# Altium PCB exercise3.PcbDoc
Units mil, origin at the board's own origin, x right, y up, seen from the top; angles counter-clockwise.
Board outline 3910 x 2550 mil, 2 copper layers (Top Layer, Bottom Layer); 24 components, 20 nets, 74 pads, 3 vias.
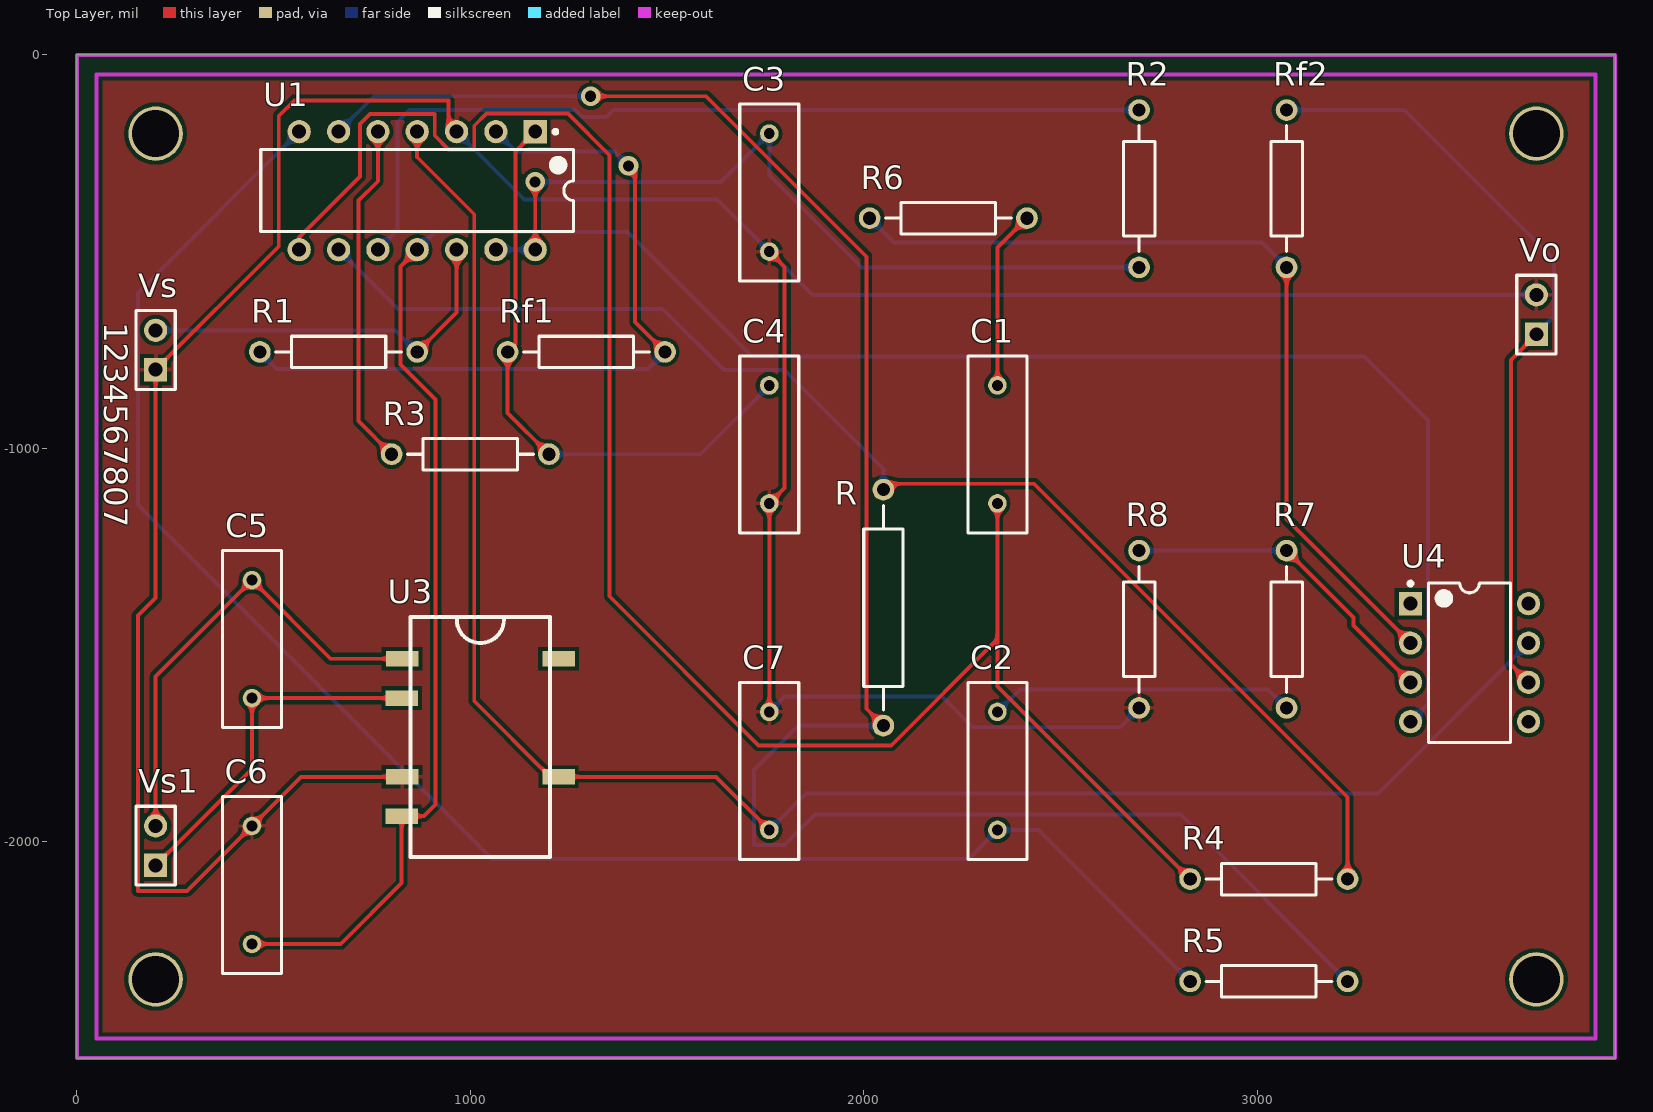
[diagram p0: Top Layer view]
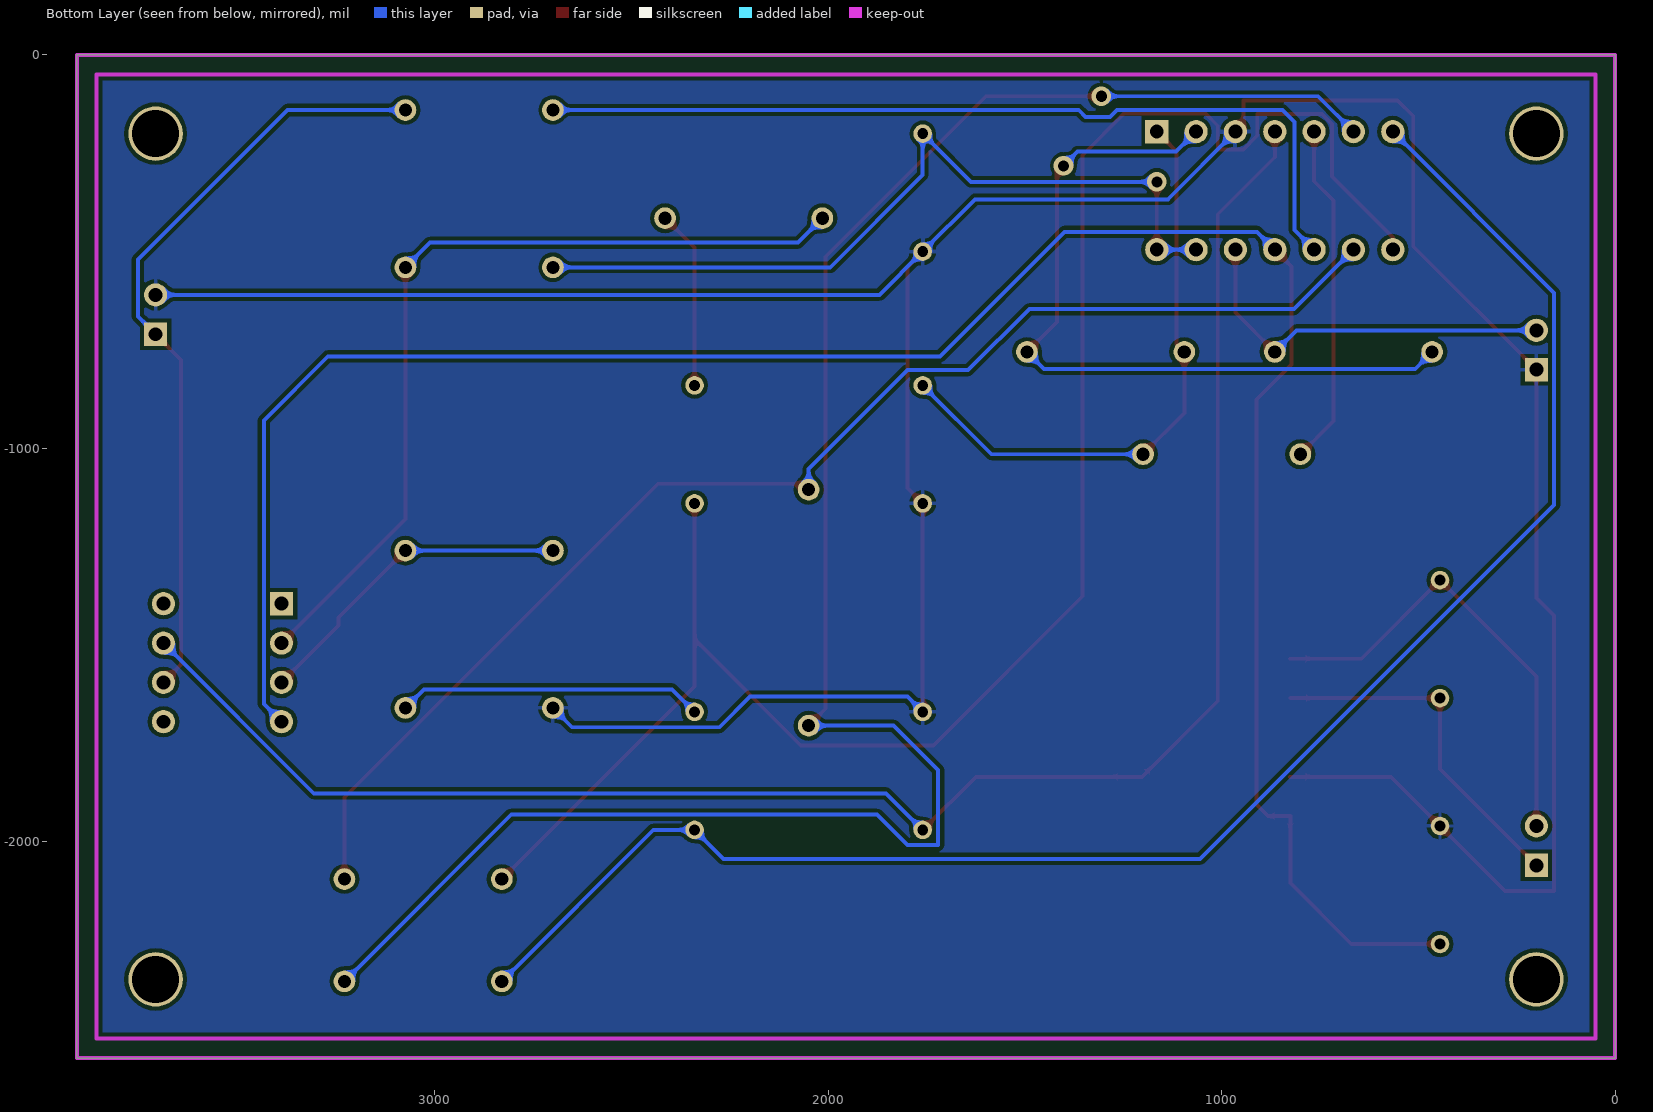
[diagram p1: Bottom Layer view, seen from below]

## Layer stack, top to bottom
Top Solder: solder mask 0.4, Solder Resist, Dk 3.5
Top Layer: signal copper 1.4
Dielectric 1: dielectric 12.6, FR-4, Dk 4.8
Bottom Layer: signal copper 1.4
Bottom Solder: solder mask 0.4, Solder Resist, Dk 3.5

## Board outline
0,-2550 0,0 3910,0 3910,-2550

## Design rules (kind name [scope] priority, off if disabled: settings)
Clearance all_to_GND [All vs InNet('GND')] p1: gap=10 ignorepadtopadclearanceinfootprint=FALSE except(0: Arc-Hole Track-Hole SMDPad-Hole THPad-Hole Via-Hole Fill-Hole Poly-Hole Region-Hole Text-Hole; 25: Arc-Arc Arc-Track Track-Track)
Clearance VCC_to_all [InNet('VCC')] p2: gap=10 ignorepadtopadclearanceinfootprint=FALSE except(0: Arc-Hole Track-Hole SMDPad-Hole THPad-Hole Via-Hole Fill-Hole Poly-Hole Region-Hole Text-Hole; 25: Arc-Arc Arc-Track Track-Track)
Clearance VEE_to_all [InNet('VEE')] p3: gap=10 ignorepadtopadclearanceinfootprint=FALSE except(0: Arc-Hole Track-Hole SMDPad-Hole THPad-Hole Via-Hole Fill-Hole Poly-Hole Region-Hole Text-Hole; 25: Arc-Arc Arc-Track Track-Track)
Clearance all_to_all [All] p4: gap=10 ignorepadtopadclearanceinfootprint=FALSE except(0: Arc-Hole Track-Hole SMDPad-Hole THPad-Hole Via-Hole Fill-Hole Poly-Hole Region-Hole Text-Hole)
PolygonConnect [All] p1: connectstyle=Relief reliefconductorwidth=10 reliefentries=4 polygonreliefangle="90 Angle" airgapwidth=10
RoutingVias [All] p1: holewidth=28 width=50 viastyle="Through Hole" minholewidth=28 minwidth=50 maxholewidth=28 maxwidth=50
SolderMaskExpansion [All] p1: expansion=4
Width all_wire [All] p1: maxlimit=10 minlimit=10 preferedwidth=10
Width GND [InNet('GND')] p2: maxlimit=30 minlimit=30 preferedwidth=30 minimp=50.000000 maximp=50.000000 favimp=50.000000
Width VEE [All] p3: maxlimit=20 minlimit=20 preferedwidth=20 minimp=50.000000 maximp=50.000000 favimp=50.000000
Width VCC [InNet('VCC')] p4: maxlimit=20 minlimit=20 preferedwidth=20 minimp=50.000000 maximp=50.000000 favimp=50.000000
30 further rules are at their usual default settings.

## Components (designator, comment, footprint, x,y, rotation, side; value= is the part's Value field where it differs from the comment)
C1 "Cap" RAD-0.3 2340,-990 r90 top value=22uF
C2 "Cap" RAD-0.3 2340,-1820 r90 top value=22uF
C3 "" RAD-0.3 1760,-350 r90 top value=30pF
C4 "Cap" RAD-0.3 1760,-990 r90 top value=30pF
C5 "Cap" RAD-0.3 445,-1485 r90 top value=4.7uF/50v
C6 "Cap" RAD-0.3 445,-2110 r90 top value=2.2uF/16v
C7 "Cap" RAD-0.3 1760,-1820 r90 top value=2.2uF/16v
R "Res Adj2" AXIAL-0.6 2050,-1405 r90 top value=100K
R1 "Res2" AXIAL-0.4 665,-755 r180 top value=10K
R2 "Res2" AXIAL-0.4 2700,-340 r90 top value=5.6K
R3 "Res2" AXIAL-0.4 1000,-1015 r180 top value=5.6K
R4 "Res2" AXIAL-0.4 3030,-2095 r180 top value=5.6K
R5 "Res2" AXIAL-0.4 3030,-2355 r180 top value=5.6K
R6 "Res2" AXIAL-0.4 2215,-415 r180 top value=20K
R7 "Res2" AXIAL-0.4 3075,-1460 r90 top value=20K
R8 "Res2" AXIAL-0.4 2700,-1460 r90 top value=510K
Rf1 "Res2" AXIAL-0.4 1295,-755 r180 top value=10K
Rf2 "Res2" AXIAL-0.4 3075,-340 r90 top value=510K
U1 "LM124AJ" J14A 865,-345 r270 top
U3 "DC-DC" DC-DC 1025,-1735 r270 top
U4 "LM741CN" N08E 3540,-1545 r0 top
Vo "CON2" HDR1X2 3710,-710 r90 top
Vs "CON1" HDR1X2 200,-800 r90 top
Vs1 "CON" HDR1X2 200,-2060 r90 top

## Footprints (in the part's own frame and the unit in brackets; to place one, negate y for a bottom-side part, rotate by r counter-clockwise, add the part's x,y. Pads: shape width x height; smd on the part's side, far side on the other; paste and mask are expansions set on the pad)
AXIAL-0.4 [mm] "Axial Device, Thru-Hole; 2 Leads; 0.4 in Pin Spacing"
  round 1.4 hole 0.85: 1(-5.08,0) 2(5.08,0)
  silkscreen extent -4.06,-1.02 4.06,1.02
AXIAL-0.6 [mm] "Axial Device, Thru-Hole; 2 Leads; 0.6 in Pin Spacing"
  round 1.4 hole 0.85: 1(-7.62,0) 2(7.62,0)
  silkscreen extent -6.6,-1.27 6.6,1.27
DC-DC [mm]
  rect 1x2.1 smd: 1(-5.08,-5.035) 2(-2.54,-5.065) 4(2.54,-5.035) 5(5.08,-5.065) 7(2.54,5.065) 10(-5.08,5.065)
  silkscreen extent -7.77,-4.48 7.73,4.52
HDR1X2 [mm] "Connector; Header; 2 Position"
  rect 1.5x1.5 hole 0.9: 1(0,0)
  round 1.5 hole 0.9: 2(2.54,0)
  silkscreen extent -1.27,-1.27 3.81,1.27
J14A [mm] "DIP, 14-Leads, Row Spacing 7.62mm, Pitch 2.54mm, Body 19.56x6.73mm"
  rect 1.5x1.5 hole 0.9: 1(-3.81,7.62)
  round 1.5 hole 0.9: 2(-3.81,5.08) 3(-3.81,2.54) 4(-3.81,0) 5(-3.81,-2.54) 6(-3.81,-5.08) 7(-3.81,-7.62) 8(3.81,-7.62) 9(3.81,-5.08) 10(3.81,-2.54) 11(3.81,0) 12(3.81,2.54) 13(3.81,5.08) 14(3.81,7.62)
  silkscreen extent -3.93,-10.1 2.65,10.1, body extent -3.6,-10.1 3.6,10.1, height 5.08
N08E [mm] "DIP, 8-Leads, Row Spacing 7.62mm, Pitch 2.54mm, Body 9.91x6.35mm"
  rect 1.5x1.5 hole 0.9: 1(-3.81,3.81)
  round 1.5 hole 0.9: 2(-3.81,1.27) 3(-3.81,-1.27) 4(-3.81,-3.81) 5(3.81,-3.81) 6(3.81,-1.27) 7(3.81,1.27) 8(3.81,3.81)
  silkscreen extent -3.93,-5.15 2.65,5.23, body extent -3.6,-5.15 3.6,5.15, height 5.34
RAD-0.3 [mm] "Radial Cap, Thru-Hole; 2 Leads; 0.3 in Pin Spacing"
  round 1.2 hole 0.7: 1(-3.81,0) 2(3.81,0)
  silkscreen extent -5.71,-1.91 5.71,1.91

## Part data
C1 C2 C4 C5 C6 C7: "Capacitor", LatestRevisionDate=17-Jul-2002, LatestRevisionNote="Re-released for DXP Platform.", PackageDescription="Radial Cap, Thru-Hole; 2 Leads; 0.3 in Pin Spacing", PackageReference=RAD-0.3, Published=8-Jun-2000, Publisher="Altium Limited"
C3: library part Cap, "Capacitor", LatestRevisionDate=17-Jul-2002, LatestRevisionNote="Re-released for DXP Platform.", PackageDescription="Radial Cap, Thru-Hole; 2 Leads; 0.3 in Pin Spacing", PackageReference=RAD-0.3, Published=8-Jun-2000, Publisher="Altium Limited"
R: "Variable Resistor", LatestRevisionDate=17-Jul-2002, LatestRevisionNote="Re-released for DXP Platform.", PackageDescription="Axial Device, Thru-Hole; 2 Leads; 0.6 in Pin Spacing", PackageReference=AXIAL-0.6, Published=8-Jun-2000, Publisher="Altium Limited", Set Position=0.5
R1 R2 R3 R4 R5 R6 R7 R8 Rf1 Rf2: "Resistor", LatestRevisionDate=17-Jul-2002, LatestRevisionNote="Re-released for DXP Platform.", PackageDescription="Axial Device, Thru-Hole; 2 Leads; 0.4 in Pin Spacing", PackageReference=AXIAL-0.4, Published=8-Jun-2000, Publisher="Altium Limited"
U1: "Low Power Quad Operational Amplifier, 14-pin CerDIP", Manufacturer="National Semiconductor", PackageTopMarking=NSUZXYYTT*LM124AJ, PowerWise=N, Supplier Part Number 1=LM124AJ-ND, ComponentLink1Description="LM124A Datasheet", ComponentLink1URL=http://www.national.com/ds/LM/LM124.pdf, ComponentLink2Description="LM124A Web Page", ComponentLink2URL=http://www.national.com/pf/LM/LM124A.html, ComponentLink3Description="J14A Package Page", ComponentLink3URL=http://www.national.com/packaging/folders/j14a.html, CompType=Amplifiers, DatasheetVersion=Aug-2000, High-Reliability=Y, LatestRevisionDate=13-Jan-2009, LatestRevisionNote="Sim Model Added.", PackageDescription="Cerdip, .400 x .310in Body, 14 Lead, .300in Centers, .100in Pitch", PackageReference=J14A, PackageVersion="revJ, Jul-2002", PartNumber=LM124AJ, PinCount=14, Published=4-Dec-2008, Publisher="Altium Limited", RoHS=N, Supplier 1=Digi-Key, Supplier 2=Farnell, Supplier Part Number 2=1416362
U3: BOM_Manufacturer=MORNSUN, BOM_Manufacturer Part=A0515XT-1WR2, BOM_Supplier=LCSC, BOM_Supplier Part=C58972, spicePre=U, spiceSymbolName=A0515XT-1WR2
U4: "Operational Amplifier, 8-pin MDIP", Manufacturer="National Semiconductor", PackageTopMarking=NSUZXYTTE#*LM*741CN, PowerWise=N, Supplier Part Number 1=1523833, Code_JEDEC=MS-001-BA, ComponentLink1Description="LM741 Datasheet", ComponentLink1URL=http://www.national.com/ds/LM/LM741.pdf, ComponentLink2Description="LM741 Web Page", ComponentLink2URL=http://www.national.com/pf/LM/LM741.html, ComponentLink3Description="N08E Package Page", ComponentLink3URL=http://www.national.com/packaging/folders/n08e.html, CompType=Amplifiers, DatasheetVersion=Aug-2000, LatestRevisionDate=13-Jan-2009, LatestRevisionNote="Sim Model Added.", PackageDescription="MDIP, .365 x .250 x .130in, 8 Lead, .100in Pitch", PackageReference=N08E, PackageVersion="revG, May-2006", PartNumber=LM741CN, PinCount=8, Published=4-Dec-2008, Publisher="Altium Limited", RoHS=N, Supplier 1=Farnell, Supplier 2=Farnell, Supplier Part Number 2=9486780
Vo Vs Vs1: library part "Header 2", "Header, 2-Pin", LatestRevisionDate=17-Jul-2002, LatestRevisionNote="Re-released for DXP Platform.", Publisher="Altium Limited"

## Free pads (board coordinates)
  round 138 hole 120: 1(200,-2350) 2(3710,-2350) 3(3710,-200) 4(200,-200)

## Via types
v1: diameter 50, hole 28, Top Layer to Bottom Layer, 3 vias

## Nets (pads, with @x,y where several pads share a name; then routed paths per layer and width w, separated by ;. In a path a pad name is that pad's centre, name@x,y a point inside that pad or via, vN(x,y) a via of type N, cw(c..) or ccw(c..) an arc to the next point about the centre after c; other vN are vias at no path point)
GND: C3.1 C4.1 C6.2 C7.2 R8.1 U1.3 U3.4 Vo.2 Vs.1 | length 8574.1
  Top Layer w10: U3.4 570,-1835 C6.2 280,-2125 155,-2125 155,-1425 200,-1380 Vs.1 513,-487 513,-155 552.53,-115.47 944.53,-115.47 944.53,-174.53 U1.3 ; C7.2 C4.1 1799,-1101 1799,-539 C3.1
  Bottom Layer w10: U1.3 1137,-367 1627,-367 C3.1 1870,-610 Vo.2 ; C7.2 1799,-1631 2199,-1631 2277,-1709 2651,-1709 R8.1
NetC1_1: C1.1 R4.2 U1.8 | length 4747.6
  Top Layer w10: U1.8 565,-464 720,-309 720,-175.47 745,-150.47 909.53,-150.47 909.53,-205 944.53,-240 1010,-240 1010,-180 1041,-149 1248,-149 1354,-255 1354,-1376 1733,-1755 2070,-1755 2340,-1485 ; C1.1 2340,-1485 ; R4.2 2340,-1605 2340,-1485
NetC1_2: C1.2 R6.1 | length 456.1
  Top Layer w10: C1.2 2340,-490 R6.1
NetC2_1: C2.1 R5.2 U1.7 | length 4356.4
  Bottom Layer w10: U1.7 155,-605 155,-1144 1054.62,-2043.62 2266.38,-2043.62 C2.1 2445,-1970 R5.2
NetC2_2: C2.2 R7.1 | length 778.1
  Bottom Layer w10: C2.2 2397,-1613 3028,-1613 R7.1
NetC3_2: C3.2 R2.1 U1.13 U1.14 | length 2060.5
  Top Layer w10: U1.14 v1(1165,-322.62)
  Bottom Layer w10: U1.13 U1.14 ; v1(1165,-322.62) 1637.38,-322.62 C3.2 1760,-305 1995,-540 R2.1
NetC4_2: C4.2 R3.1 Rf1.2 U1.1 | length 1525
  Top Layer w10: U1.1 1115,-245 1115,-735 Rf1.2 1095,-910 R3.1
  Bottom Layer w10: R3.1 1585,-1015 C4.2
NetC5_2: C5.2 U3.1 Vs1.2 | length 1191.1
  Top Layer w10: Vs1.2 200,-1580 C5.2 645,-1535 U3.1
NetR1_1: R1.1 U1.12 Vs.2 | length 989.2
  Top Layer w10: R1.1 965,-655 U1.12
  Bottom Layer w10: Vs.2 810,-700 R1.1
NetR1_2: R1.2 Rf1.1 U1.2 | length 1950.2
  Top Layer w10: v1(1402,-282) 1419,-299 1419,-679 Rf1.1
  Bottom Layer w10: R1.2 508,-798 1452,-798 Rf1.1 ; U1.2 1116,-246 1366,-246 v1(1402,-282)
NetR2_2: R2.2 U1.10 | length 2257.5
  Bottom Layer w10: U1.10 815,-445 815,-170 845,-140 1266.08,-140 1283.38,-157.3 1346.08,-157.3 1363.38,-140 R2.2
NetR3_2: R3.2 U1.5 | length 875.1
  Top Layer w10: U1.5 765,-321 716,-370 716,-931 R3.2
NetR4_1: R4.1 R.2 U1.9 | length 3392.8
  Top Layer w10: R.2 2065,-1090 2433,-1090 3230,-1887 R4.1
  Bottom Layer w10: U1.9 816,-646 1489,-646 1644.38,-801.38 1799,-801.38 2050,-1052.38 R.2
NetR5_1: R5.1 R.1 U1.6 | length 5041.3
  Top Layer w10: v1(1306,-105) 1599,-105 2007,-513 2007,-1662 R.1
  Bottom Layer w10: U1.6 755,-105 v1(1306,-105) ; R.1 1834,-1705 1721,-1818 1721,-2008.62 1799,-2008.62 1876.62,-1931 2806,-1931 R5.1
NetR6_2: R6.2 Rf2.1 U4.2 | length 2197.3
  Top Layer w10: Rf2.1 3075,-1180 U4.2
  Bottom Layer w10: R6.2 2077,-477 3012,-477 Rf2.1
NetR7_2: R7.2 R8.2 U4.3 | length 840.5
  Top Layer w10: R7.2 3245,-1430 3245,-1450 U4.3
  Bottom Layer w10: R8.2 R7.2
NetRf2_2: Rf2.2 U4.6 Vo.1 | length 1976.6
  Top Layer w10: U4.6 3645,-1550 3645,-775 Vo.1
  Bottom Layer w10: Rf2.2 3375,-140 3755,-520 3755,-665 Vo.1
VCC: C7.1 U1.4 U3.7 U4.7 | length 4519.7
  Top Layer w10: U1.4 865,-260 1010,-405 1010,-1642 1203,-1835 U3.7 1625,-1835 C7.1
  Bottom Layer w10: C7.1 1853,-1877 3308,-1877 U4.7
VEE: C6.1 U1.11 U3.5 U4.4 | length 5750
  Top Layer w10: C6.1 670.58,-2260 825.58,-2105 U3.5 882,-1935 912,-1905 912,-876 822.44,-786.44 822.44,-537.56 U1.11
  Bottom Layer w10: U1.11 910,-450 1400,-450 1716.38,-766.38 3272.38,-766.38 3435,-929 3435,-1650 U4.4
VIN: C5.1 U3.2 Vs1.1 | length 907.1
  Top Layer w10: Vs1.1 445,-1815 C5.1 U3.2
pads on no net: U3.10 U4.1 U4.5 U4.8

## Polygon pours and split planes (outlines as drawn)
GND on Top Layer "Top Layer-GND" (solid, remove dead copper, pour order 6): 0,0 3910,0 3910,-2550 0,-2550
no net on Top Layer "Top Layer-No Net" (solid, remove dead copper, pour order 2): 3405,-1915
GND on Bottom Layer "Bottom Layer-GND" (solid, remove dead copper, pour order 10): 0,0 3910,0 3910,-2550 0,-2550

## Keep-outs
Keep-Out Layer:
  lines w10: 0,-2550 3910,-2550 3910,0 0,0 0,-2550 ; 50,-2500 50,-50 3860,-50 3860,-2500 50,-2500

## Silkscreen, mask and mechanical layers (free items; w line width, h text height)
Top Overlay:
  text "1234567807" at 70,-680 h60 r270